# Altium PCB ToF_Board.PcbDoc
Units mm, origin at the board's own origin, x right, y up, seen from the top; angles counter-clockwise.
Board outline 7 x 18.2 mm, 2 copper layers (Top Layer, Bottom Layer); 4 components, 6 nets, 22 pads, 4 vias.
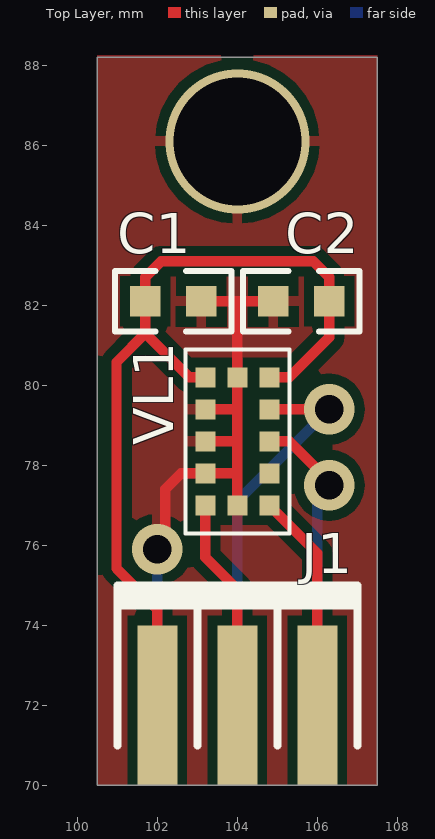
[diagram p0: Top Layer view]
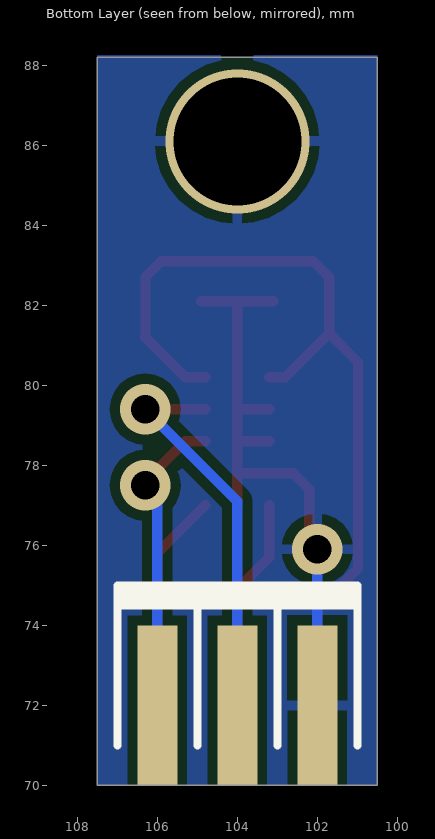
[diagram p1: Bottom Layer view, seen from below]

## Layer stack, top to bottom
Top Solder: solder mask 0.0102, Solder Resist, Dk 3.5
Top Layer: signal copper 0.0356
Dielectric 1: dielectric 0.32, FR-4, Dk 4.8
Bottom Layer: signal copper 0.0356
Bottom Solder: solder mask 0.0102, Solder Resist, Dk 3.5

## Board outline
100.5,70 100.5,88.2 107.5,88.2 107.5,70

## Design rules (kind name [scope] priority, off if disabled: settings)
Clearance [All] p1: gap=0.254 ignorepadtopadclearanceinfootprint=FALSE except(0: Arc-Hole Track-Hole SMDPad-Hole THPad-Hole Via-Hole Fill-Hole Poly-Hole Region-Hole Text-Hole)
PolygonConnect [All] p1: connectstyle=Relief reliefconductorwidth=0.254 reliefentries=4 polygonreliefangle="90 Angle" airgapwidth=0.254
RoutingVias [All] p1: holewidth=0.711 width=1.27 viastyle="Through Hole" minholewidth=0.711 minwidth=1.27 maxholewidth=0.711 maxwidth=1.27
SolderMaskExpansion [All] p1: expansion=0.102
Width [All] p1: maxlimit=0.254 minlimit=0.254 preferedwidth=0.254
30 further rules are at their usual default settings.

## Components (designator, comment, footprint, x,y, rotation, side; value= is the part's Value field where it differs from the comment)
C1 "100n" 0603 102.4,82.1 r0 top
C2 "4.7u" 0603 105.6,82.1 r180 top
J1 "Pin 2.00mm" 2mmEdgePCB6Pin 102,72 r0 top
VL1 "VL53L0X" LGA12 104,80.2 r0 top

## Footprints (in the part's own frame and the unit in brackets; to place one, negate y for a bottom-side part, rotate by r counter-clockwise, add the part's x,y. Pads: shape width x height; smd on the part's side, far side on the other; paste and mask are expansions set on the pad)
2mmEdgePCB6Pin [mm]
  rect 1x4 smd: 1(0,0) 3(2,0) 5(4,0)
  rect 1x4 smd far side: 2(0,0) 4(2,0) 6(4,0)
  silkscreen extent -1,-1 5,3
0603 [mil]
  rect 30x30 smd: 1(-27.5,0) 2(27.5,0)
  silkscreen extent -58,-30 58,30, body extent -31,-16 31,16, height 31
LGA12 [mm]
  rect 0.5x0.5 smd: 1(-0.8,0) 2(-0.8,-0.8) 3(-0.8,-1.6) 4(-0.8,-2.4) 5(-0.8,-3.2) 6(0,-3.2) 7(0.8,-3.2) 8(0.8,-2.4) 9(0.8,-1.6) 10(0.8,-0.8) 11(0.8,0) 12(0,0)
  silkscreen extent -1.3,-3.9 1.3,0.7, body extent -1.3,-3.9 1.3,0.7, height 1.1

## Part data
C1 C2: library part C_CER, "Ceramic Capacitor"
J1: library part "Goldpin 2.00 pin 2x3", Supplier=TME, Symbol="NINIGI ZL303-2X10P", URL=http://www.tme.eu/pl/details/zl303-2x10p/listwy-i-gniazda-kolkowe/ninigi/#
VL1: library part "VL53L0X ToF", "Time-of-Flight ranging and gesture detection sensor", Supplier=Farnell, URL=http://pl.farnell.com/stmicroelectronics/vl53l0cxv0dh-1/gesture-detection-sensor-digital/dp/2762754?st=VL53L0X

## Via types
v1: diameter 1.27, hole 0.711, Top Layer to Bottom Layer, 3 vias
v2: diameter 3.6, hole 3.2, Top Layer to Bottom Layer, 1 vias

## Nets (pads, with @x,y where several pads share a name; then routed paths per layer and width w, separated by ;. In a path a pad name is that pad's centre, name@x,y a point inside that pad or via, vN(x,y) a via of type N, cw(c..) or ccw(c..) an arc to the next point about the centre after c; other vN are vias at no path point)
GND: C1.2 C2.2 J1.2 VL1.2 VL1.3 VL1.4 VL1.6 VL1.12 | length 16.4
  Top Layer w0.254: v1(102,75.9) 102.2,75.7 102.2,77.4 102.6,77.8 VL1.4 104,77.8 ; C1.2 104,82.1 ; VL1.3 104,78.6 ; VL1.2 104,79.4 ; VL1.6 104,77.8 ; C2.2 104,82.1 ; 104,77.8 104,78.6 ; 104,78.6 104,79.4 ; 104,79.4 VL1.12 104,82.1
  Bottom Layer w0.254: J1.2 v1(102,75.9)
  other v2: 104,86.1
NetJ1_3: J1.3 VL1.5 | length 5.3
  Top Layer w0.254: VL1.5 103.2,75.7 104,74.9 J1.3
NetJ1_4: J1.4 VL1.10 | length 9.9
  Top Layer w0.254: VL1.10 v1(106.3,79.4)
  Bottom Layer w0.254: J1.4 104,77.1 v1(106.3,79.4)
NetJ1_5: J1.5 VL1.7 | length 5.5
  Top Layer w0.254: VL1.7 106,75.8 J1.5
NetJ1_6: J1.6 VL1.9 | length 7.6
  Top Layer w0.254: VL1.9 105.3,78.6 106.3,77.6 v1(106.3,77.5)
  Bottom Layer w0.254: J1.6 106,77.2 v1(106.3,77.5)
VCC: C1.1 C2.1 J1.1 VL1.1 VL1.11 | length 21.7
  Top Layer w0.254: J1.1 102,74.4 100.984,75.416 100.984,80.581 101.702,81.298 ; VL1.1 102.8,80.2 101.702,81.298 ; VL1.11 105.3,80.2 106.3,81.2 106.298,81.202 C2.1 106.298,82.701 105.9,83.1 102.1,83.1 101.7,82.7 101.702,82.698 C1.1 101.702,81.298
pads on no net: VL1.8

## Polygon pours and split planes (outlines as drawn)
GND on Bottom Layer "GND_L02_P000" (solid, pour order 0): 107.5,88.25 107.5,70 100.5,70 100.5,88.25
GND on Top Layer "GND_L01_P002" (solid, pour order 2): 107.5,88.25 107.5,70 100.5,70 100.5,88.25

## Silkscreen, mask and mechanical layers (free items; w line width, h text height)
Mechanical 13:
  the board outline again, w0.2